# EAGLE board E-Piano-SM (EAGLE 9.4.0)
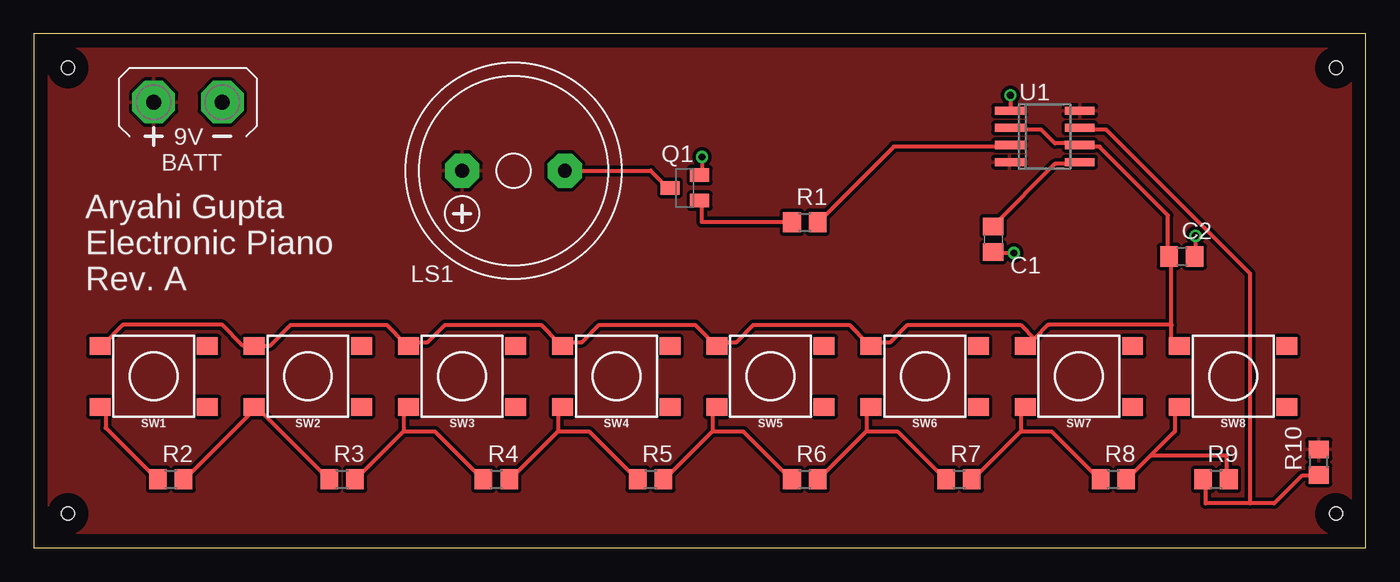
[diagram p0: board, top side]
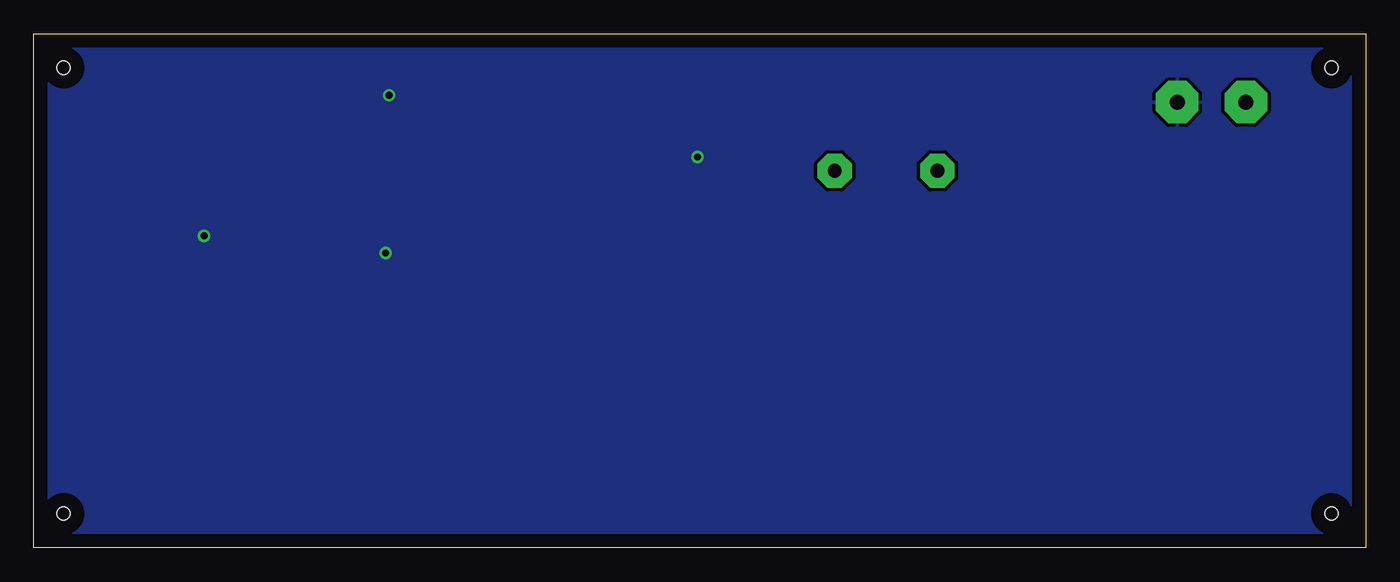
[diagram p1: board, bottom side, seen from below]

Size 98.73 x 38.09 mm. Coordinates in mm from the lower left corner, seen from the top.
Outline: 0,0 98.73,0 98.73,38.09 0,38.09 0,0
Copper layers (1*16): Top 0.035mm / dielectric 1.5mm / Bottom 0.035mm
Design rules "default": minimum track width 6mil, minimum drill 0.35mm, track to track 6mil, track to pad 6mil, pad to pad 6mil, via to via 6mil, smd to smd 6mil, copper to edge 40mil, drill to drill 6mil, minimum pad ring 10mil, minimum via ring 8mil, stop-mask expansion 4mil, vias tented up to drill 0mil, thermal gap 10mil
Net classes: 0 default: width 0.305 mm, drill 0.508 mm, clearance 0.254 mm
Holes 1 mm at 2.54,35.56 96.52,35.56 96.52,2.54 2.54,2.54

## Footprints (pad centres in the part's own frame; a part is rotated, then mirrored left to right if it is on the bottom)
AB9V = drill 1.118 pad 3.15 octagon: + 0,2.54; - 0,-2.54
C0805 = smd 1.3 x 1.5: 1 -0.95,0; 2 0.95,0
F/HMB = drill 1.016 pad 2.54 octagon: + 3.81,0; - -3.81,0
SOT23-BEC = smd 1 x 1.4: B -0.95,-1.1; C 0,1.1; E 0.95,-1.1
R0805 = smd 1.3 x 1.5: 1 -0.95,0; 2 0.95,0
TACTILE_SWITCH_SMD_6.2MM_TALL = smd 1.55 x 1.3: A1 -3.975,-2.25; A2 3.975,-2.25; B1 -3.975,2.25; B2 3.975,2.25
SO08 = smd 0.6 x 2.2: 1 -1.905,-2.6; 2 -0.635,-2.6; 3 0.635,-2.6; 4 1.905,-2.6; 5 1.905,2.6; 6 0.635,2.6; 7 -0.635,2.6; 8 -1.905,2.6

## Placement (x,y rotation side)
BATT  AB9V  [AB9V]  11.43,33.02 90 top
C1  0.1uF  [C0805]  71.12,22.86 270 top
C2  0.1uF  [C0805]  85.09,21.59 0 top
LS1  [F/HMB]  35.56,27.94 180 top
Q1  BCW66  [SOT23-BEC]  48.26,26.67 90 top
R1  3K  [R0805]  57.15,24.13 0 top
R2  1.5K  [R0805]  10.16,5.08 0 top
R3  1.3K  [R0805]  22.86,5.08 0 top
R4  620  [R0805]  34.29,5.08 0 top
R5  1.1K  [R0805]  45.72,5.08 0 top
R6  1K  [R0805]  57.15,5.08 0 top
R7  910  [R0805]  68.58,5.08 0 top
R8  390  [R0805]  80.01,5.08 0 top
R9  6.2K  [R0805]  87.63,5.08 0 top
R10  1K  [R0805]  95.25,6.35 90 top
SW1  MOMENTARY-SWITCH-SPST-SMD-6.2MM-TALL  [TACTILE_SWITCH_SMD_6.2MM_TALL]  8.89,12.7 180 top
SW2  MOMENTARY-SWITCH-SPST-SMD-6.2MM-TALL  [TACTILE_SWITCH_SMD_6.2MM_TALL]  20.32,12.7 180 top
SW3  MOMENTARY-SWITCH-SPST-SMD-6.2MM-TALL  [TACTILE_SWITCH_SMD_6.2MM_TALL]  31.75,12.7 180 top
SW4  MOMENTARY-SWITCH-SPST-SMD-6.2MM-TALL  [TACTILE_SWITCH_SMD_6.2MM_TALL]  43.18,12.7 180 top
SW5  MOMENTARY-SWITCH-SPST-SMD-6.2MM-TALL  [TACTILE_SWITCH_SMD_6.2MM_TALL]  54.61,12.7 180 top
SW6  MOMENTARY-SWITCH-SPST-SMD-6.2MM-TALL  [TACTILE_SWITCH_SMD_6.2MM_TALL]  66.04,12.7 180 top
SW7  MOMENTARY-SWITCH-SPST-SMD-6.2MM-TALL  [TACTILE_SWITCH_SMD_6.2MM_TALL]  77.47,12.7 180 top
SW8  MOMENTARY-SWITCH-SPST-SMD-6.2MM-TALL  [TACTILE_SWITCH_SMD_6.2MM_TALL]  88.9,12.7 180 top
U1  NE555D  [SO08]  74.93,30.48 270 top

## Library data of the parts
BATT = battery; MOUSER#: 534-81-8TB; MPN: 81-8; OC_NEWARK: unknown
C1 C2 = rcl; MOUSER#: 603-CC805JRX7R9BB104; MPN: CC805JRX7R9BB104; OC_NEWARK: unknown; SPICEPREFIX: C
LS1 = buzzer; MOUSER#: 665-AST-01508MR-R; OC_FARNELL: unknown; OC_NEWARK: unknown
Q1 = transistor; MF: FAIRCHILD SEMICONDUCTOR; MOUSER#: 726-BCW66KHE6327HTSA; MPN: PN2222ATF; OC_NEWARK: 58K2048
R1 R6 R10 = rcl; MOUSER#: 652-CR0805FX-1001ELF; OC_NEWARK: unknown; SPICEPREFIX: R
R2 = rcl; MOUSER#: 652-CR0805FX-1501ELF; OC_NEWARK: unknown; SPICEPREFIX: R
R3 = rcl; MOUSER#: 652-CR0805JW-132ELF; OC_NEWARK: unknown; SPICEPREFIX: R
R4 = rcl; MOUSER#: 652-CR0805JW-621ELF; OC_NEWARK: unknown; SPICEPREFIX: R
R5 = rcl; MOUSER#: 652-CR0805FX-1101ELF; OC_NEWARK: unknown; SPICEPREFIX: R
R7 = rcl; MOUSER#: 652-CR0805FX-9100ELF; OC_NEWARK: unknown; SPICEPREFIX: R
R8 = rcl; MOUSER#: 652-CR0805JW-391ELF; OC_NEWARK: unknown; SPICEPREFIX: R
R9 = rcl; MOUSER#: 652-CR0805FX-6201ELF; OC_NEWARK: unknown; SPICEPREFIX: R
SW1-SW8 = SparkFun-Switches; MOUSER#: 693-1301.9317; MPN: 1301.9317; OC_NEWARK: unknown; PROD_ID: SWCH-11966; SF_SKU: COM-12992
U1 = linear; MOUSER#: 595-TLC555CDR; OC_NEWARK: unknown

## Nets
0: BATT.- C1.2 C2.2 Q1.E U1.1
N$1: R8.2 R9.2 SW8.B2
N$2: R9.1 R10.1 U1.7
N$3: R2.1 SW1.B2
N$4: R7.2 R8.1 SW7.B2
N$5: R6.2 R7.1 SW6.B2
N$6: R5.2 R6.1 SW5.B2
N$7: R4.2 R5.1 SW4.B2
N$8: R3.2 R4.1 SW3.B2
N$9: R2.2 R3.1 SW2.B2
N$11: R1.2 U1.3
N$12: C1.1 U1.5
N$13: LS1.- Q1.C
N$14: Q1.B R1.1
TR: C2.1 SW1.A2 SW2.A2 SW3.A2 SW4.A2 SW5.A2 SW6.A2 SW7.A2 SW8.A2 U1.2 U1.6
VCC: BATT.+ LS1.+ R10.2 U1.4 U1.8

## Tracks (layer width: path | path; a pad name or v marks a point on that pad's centre or on a via)
0  (via drill 0.51)
  Top 0.305: v49.53,28.96 49.53,27.69 Q1.E | v72.64,21.84 71.12,21.84 C1.2 | v86.11,23.11 86.11,21.59 C2.2 | v72.39,33.53 72.39,32.51 U1.1
  pour Bottom: 0,38.1 99.06,38.1 99.06,0 0,0
N$1
  Top 0.305: 82.8,6.86 84.58,8.64 84.58,10.41 84.84,10.41 SW8.B2 | 82.8,6.86 81.03,5.08 R8.2 | 82.8,6.86 88.39,6.86 88.39,5.08 R9.2
N$2
  Top 0.305: 90.17,3.3 91.95,3.3 93.98,5.33 95.25,5.33 R10.1 | 90.17,3.3 86.87,3.3 86.87,5.08 R9.1 | 90.17,3.3 90.17,20.32 79.5,30.99 77.72,30.99 U1.7
N$3
  Top 0.305: R2.1 9.14,5.08 5.33,8.89 5.33,10.41 5.08,10.41 SW1.B2
N$4
  Top 0.305: 73.15,8.64 69.6,5.08 R7.2 | 73.15,8.64 73.15,10.41 73.41,10.41 SW7.B2 | 73.15,8.64 75.44,8.64 78.99,5.08 R8.1
N$5
  Top 0.305: 61.72,8.64 58.17,5.08 R6.2 | 61.72,8.64 61.72,10.41 61.98,10.41 SW6.B2 | 61.72,8.64 64.01,8.64 67.56,5.08 R7.1
N$6
  Top 0.305: 50.29,8.64 46.74,5.08 R5.2 | 50.29,8.64 50.29,10.41 50.55,10.41 SW5.B2 | 50.29,8.64 52.58,8.64 56.13,5.08 R6.1
N$7
  Top 0.305: 38.86,8.64 35.31,5.08 R4.2 | 38.86,8.64 38.86,10.41 39.12,10.41 SW4.B2 | 38.86,8.64 41.15,8.64 44.7,5.08 R5.1
N$8
  Top 0.305: 27.43,8.64 23.88,5.08 R3.2 | 27.43,8.64 27.43,10.41 27.69,10.41 SW3.B2 | 27.43,8.64 29.72,8.64 33.27,5.08 R4.1
N$9
  Top 0.305: 16.51,10.41 11.18,5.08 R2.2 | 16.51,10.41 21.84,5.08 R3.1 | 16.51,10.41 SW2.B2
N$11
  Top 0.305: R1.2 58.17,24.13 63.75,29.72 72.14,29.72 U1.3
N$12
  Top 0.305: C1.1 71.12,23.88 75.69,28.45 77.47,28.45 U1.5
N$13
  Top 0.305: LS1.- 45.72,27.94 46.99,26.67 Q1.C
N$14
  Top 0.305: R1.1 49.53,24.13 49.53,25.65 Q1.B
TR
  Top 0.305: U1.2 72.39,30.99 74.68,30.99 75.69,29.97 77.47,29.97 U1.6 77.72,29.72 78.99,29.72 84.07,24.64 84.07,21.59 C2.1 84.33,21.59 84.33,16.51 | 84.33,16.51 84.33,14.99 84.84,14.99 SW8.A2 | 74.17,15.49 75.18,16.51 84.33,16.51 | 74.17,15.49 73.66,14.99 SW7.A2 74.17,15.49 | SW1.A2 5.08,14.99 6.6,16.51 13.97,16.51 15.49,14.99 16.26,14.99 SW2.A2 16.51,14.99 17.53,14.99 19.05,16.51 26.16,16.51 27.43,15.24 | 27.43,15.24 27.69,14.99 SW3.A2 27.43,15.24 | 38.86,15.24 37.59,16.51 30.48,16.51 29.21,15.24 27.43,15.24 | 38.86,15.24 39.12,14.99 SW4.A2 38.86,15.24 | 50.29,15.24 49.02,16.51 41.91,16.51 40.64,15.24 38.86,15.24 | 50.29,15.24 50.55,14.99 SW5.A2 50.29,15.24 | 61.72,15.24 60.45,16.51 53.34,16.51 52.07,15.24 50.29,15.24 | 61.72,15.24 61.98,14.99 SW6.A2 61.72,15.24 | 74.17,15.49 73.15,16.51 64.77,16.51 63.5,15.24 61.72,15.24
VCC
  pour Top: 0,38.1 99.06,38.1 99.06,0 0,0

## Text on the board
tPlace: Aryahi Gupta / Electronic Piano / Rev. A